# Altium PCB MCU099_MSPM0L1306_PCB.PcbDoc (part 3 of 5)
Units mil, origin at the board's own origin, x right, y up, seen from the top; angles counter-clockwise.
Board outline 2310.03 x 3906.03 mil, 4 copper layers (Top Layer, VCC Layer, GND Layer, Bottom Layer), stack 62.4 mil thick; 211 components, 124 nets, 674 pads, 192 vias.
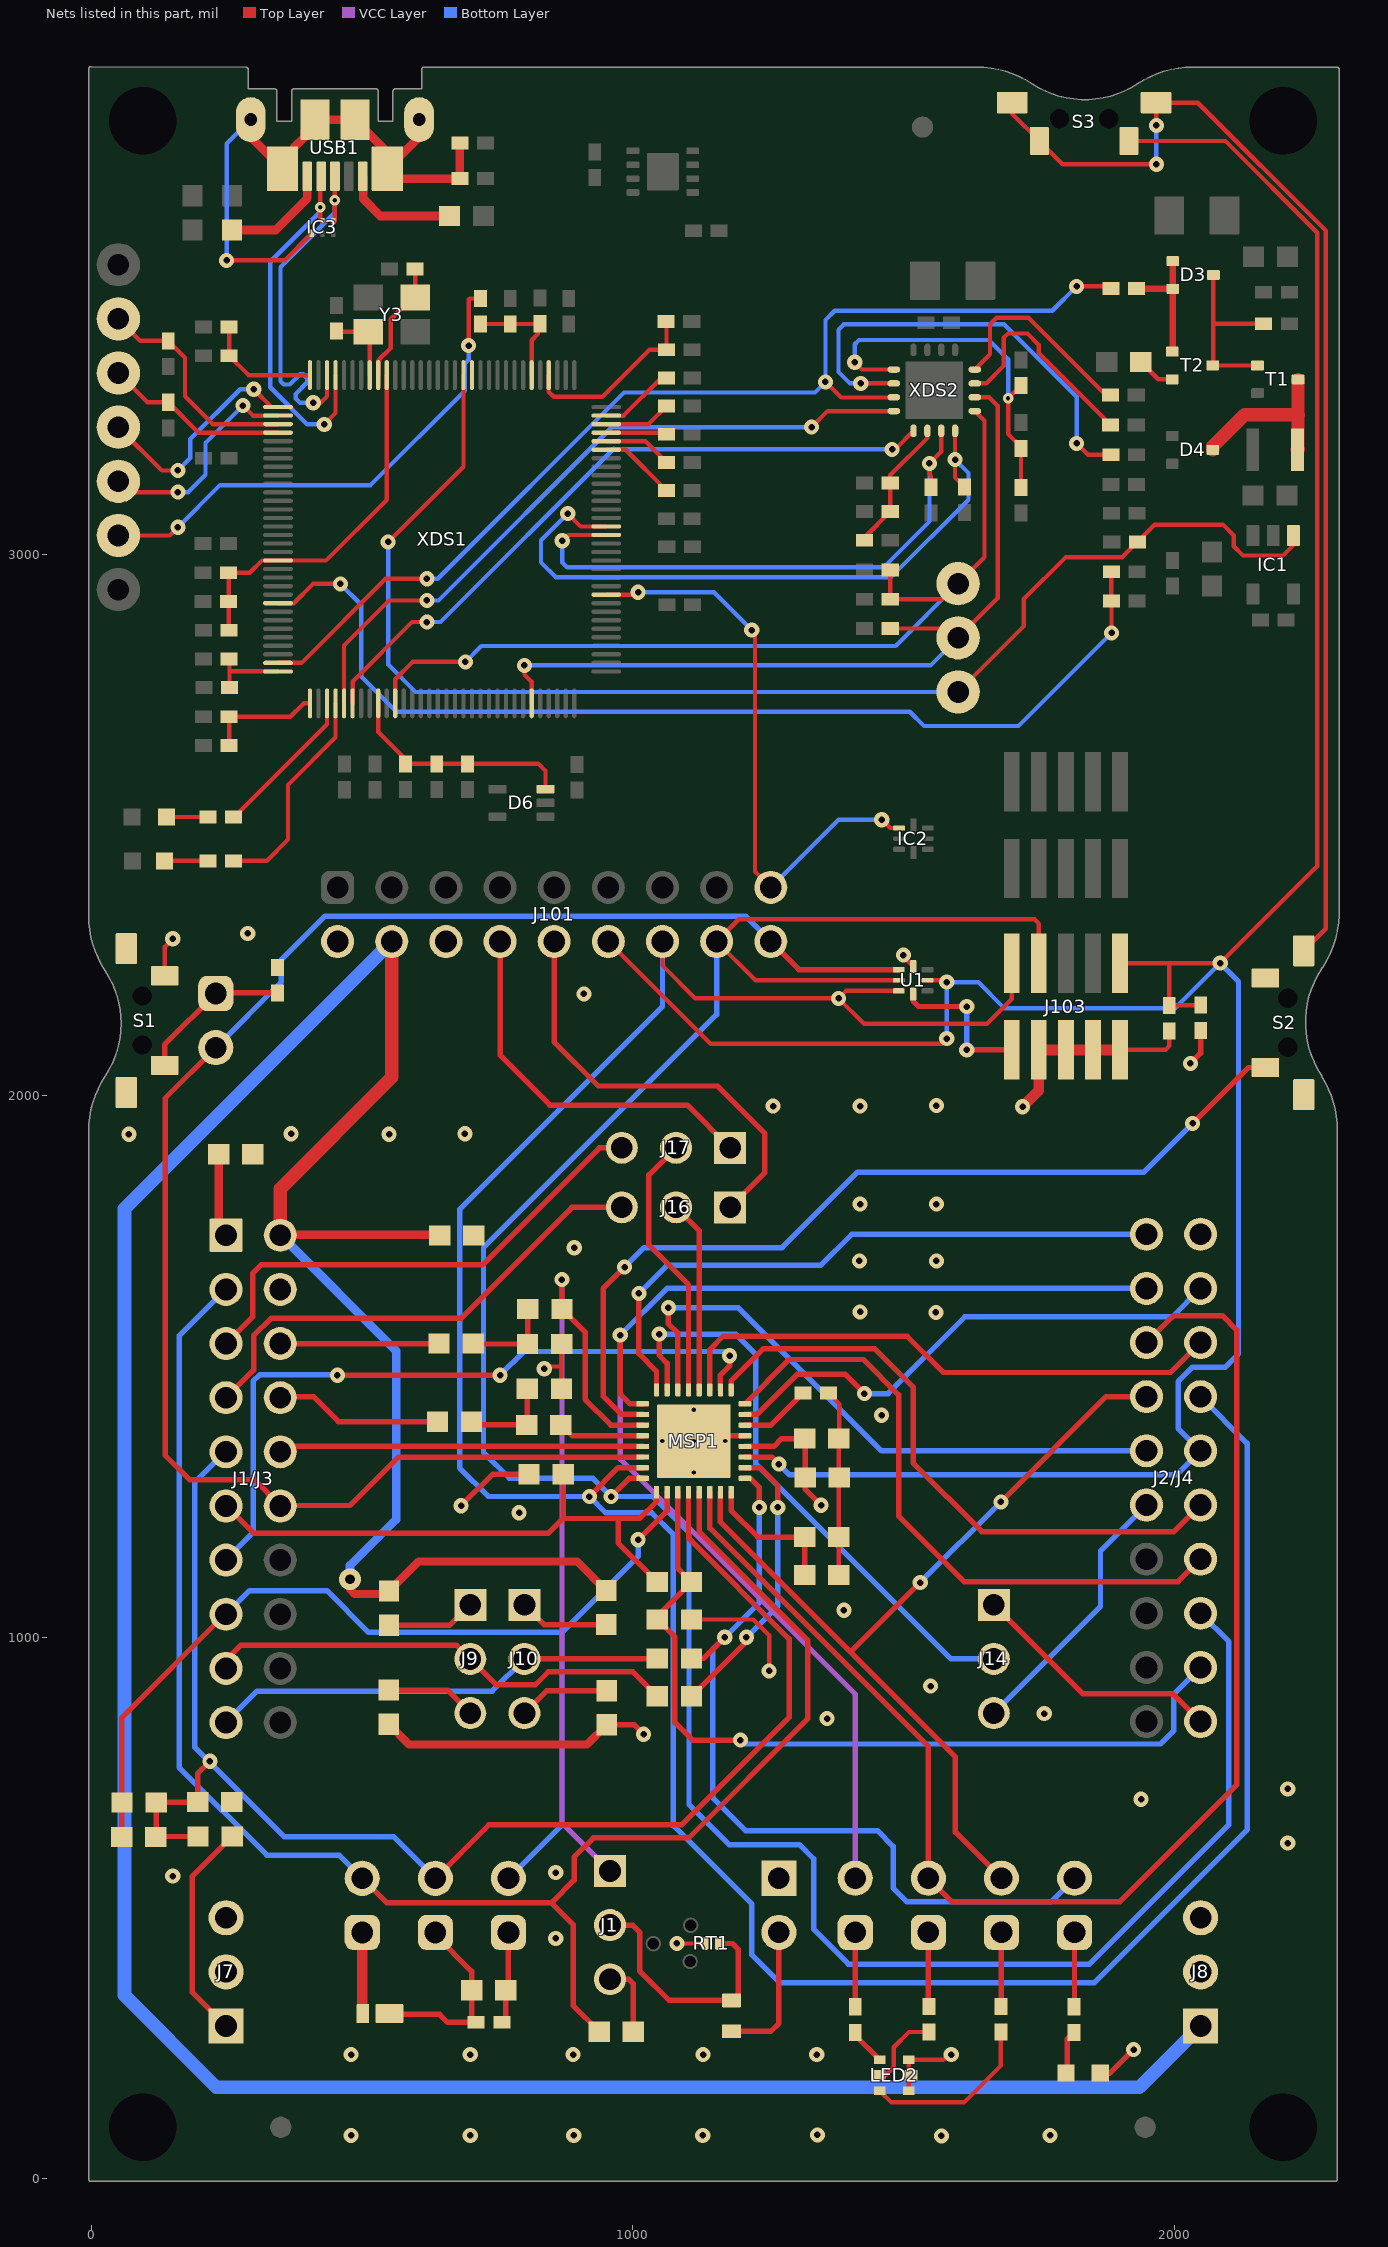
[diagram p4: the nets of this part, all layers, seen from the top]

## Part data (continued)
H1 H2: library part CMP-0077978-1, "Spacer Support, Nylon 66", Manufacturer="Kang Yang", ComponentLink1Description="Datasheet Link", ComponentLink1URL=https://sps16.itg.ti.com/sites/KMS/crossdivteams/altium/docs/ComponentDatasheets/1104004000018---MAE-10.pdf, CompType=Standoff, Key=MAE-10, MountType=N/A, PackageReference="Spacer Nylon Support", PartNumber=MAE-10, RoHS=Y
IC1: library part CMP-0074212-1, "2.7-4V Dual In/Single Out MOSFET, 0.5A Main/0.1A Aux Input, Act-Low Enable, Comm. Temp., DBV0005A (SOT-23-5)", Alternate Manufacturer="Texas Instruments", Alternate PartNumber=TPS2102DBVT, ComponentLink1Description="Datasheet Link", ComponentLink1URL=http://www.ti.com/lit/ds/symlink/tps2102.pdf, CompType=IC, Footprint Path 6=C:\AltiumLibraries\Footprints\TI\.PcbLib, LatestRevisionDate=2017-06-09, Manufacturer="Texas Instruments", MountType=SMT, PackageDescription=SOT-23-5, PackageReference=DBV0005A, PartNumber=TPS2102DBVR, Publisher="Texas Instruments", RoHS=Y, SizeArea_mm2=8.12, SizeAreaWB_mm2=14.82, SizeX_mm=2.8, SizeY_mm=2.9, SizeZ_mm=1.45, U/M=EA
IC2 U1: library part CMP-0043125-2, "Low-Capacitance + / - 15 kV ESD Protection Array for High-Speed Data Interfaces, 6 Channels, -40 to +85 degC, 8-pin UQFN (RSE), Green (RoHS & no Sb/Br)", Breakdown Voltage(Min)(V)=6, IO Capacitance(Typ)(pF)=1.6, IO Leakage Current(nA)=1, Manufacturer="Texas Instruments", 1394 / Firewire=TRUE, ComponentLink1Description="Manufacturer URL", ComponentLink1URL=http://www.ti.com/, ComponentLink2Description=Datasheet, ComponentLink2URL=http://www.ti.com/general/docs/lit/getliterature.tsp?genericPartNumber=TPD6E004&fileType=pdf, ComponentLink3Description="URL Link1", ComponentLink3URL=SamplesURL:http://www.ti.com/product/tpd6e004#samples, DatasheetVersion=SLLS799A, Eco-Plan="Green (RoHS & no Sb/Br)", IEC 61000-4-2 Air-Gap(+/- kV)=12, IEC 61000-4-2 Contact(+/- kV)=8, Mounting Technology="Surface Mount", PackageDescription="8-Pin Plastic Quad Flatpack No-Lead, 1.5 x 1.5 mm Body, 0.5 mm Pitch", PackageReference=RSE0008A, PackageVersion="revD, Jan-2011", PartNumber=TPD6E004RSER, Serial ATA / eSATA=TRUE, SubFamily="ESD Solution", USB High Speed=TRUE
IC3: library part CMP-0043115-1, "ESD-Protection Array for High-Speed Data Interfaces, 4 Channels, -40 to +85 degC, 6-pin SON (DRY), Green (RoHS & no Sb/Br)", Breakdown Voltage(Min)(V)=6, IO Capacitance(Typ)(pF)=1.6, IO Leakage Current(nA)=1, Manufacturer="Texas Instruments", 1394 / Firewire=TRUE, ComponentLink1Description="Manufacturer URL", ComponentLink1URL=http://www.ti.com/, ComponentLink2Description=Datasheet, ComponentLink2URL=http://www.ti.com/general/docs/lit/getliterature.tsp?genericPartNumber=TPD4E004&fileType=pdf, ComponentLink3Description="URL Link1", ComponentLink3URL=SamplesURL:http://www.ti.com/product/tpd4e004#samples, DatasheetVersion=SLVS729A, Eco-Plan="Green (RoHS & no Sb/Br)", IEC 61000-4-2 Air-Gap(+/- kV)=12, IEC 61000-4-2 Contact(+/- kV)=8, Mounting Technology="Surface Mount", PackageDescription="6-Pin Plastic Small Outline No-Lead, 1 x 1.45 x 0.6 mm Body, 0.5 mm Pitch", PackageReference=DRY0006A, PackageVersion="revF, Dec-2011", PartNumber=TPD4E004DRYR, Serial ATA / eSATA=TRUE, SubFamily="ESD Solution", USB High Speed=TRUE
IC4: library part CMP-0036329-3, "500mA, Adjustable, Low Quiescent Current, Low-Noise, High-PSRR, Single-Output LDO Regulator, DRB0008A (VSON-8)", Manufacturer="Texas Instruments", Operating Temperature Range="-40 to 125 C", Rating=Catalog, Accuracy(%)=2, AEC Category=Q200, AEC Qualified=N, ComponentLink1Description="Datasheet Link", ComponentLink1URL=http://www.ti.com/lit/ds/symlink/tps735.pdf, ComponentLink2Description="Product Folder", ComponentLink2URL=http://www.ti.com/product/tps735, ComponentLink3Description="Online Datasheet", ComponentLink3URL=http://www.ti.com/product/tps735/datasheet, CompType=IC, Fixed Output Options(V)=3.3, Iout(Max)(A)=0.5, Iq(Typ)(mA)=0.04, MountType=SMT, PackageDescription=VSON-8, PackageReference=DRB0008A, PartNumber=TPS73533DRBT, RoHS=Y, SizeArea_mm2=9.0, SizeAreaWB_mm2=16.0, SizeX_mm=3.0, SizeY_mm=3.0, SizeZ_mm=1.0, Vdo(Typ)(mV)=280, Vin(Max)(V)=6.5, Vin(Min)(V)=2.7, Vout Adj(Max)(V)=3.3, Vout Adj(Min)(V)=3.3
J1 J7 J8 J9 J10 J14 J16 J17: library part CMP-0002338-1, "Header, 100mil, 3x1, Tin, TH", Color=Black, Current_A=3A, Manufacturer="Sullins Connector Solutions", Supplier Part Number 1=S1012E-03-ND, Voltage_V=1.8kV, Cert_UL=Y, ClassName=Header, CNHeader=TRUE, ComponentLink1Description="Datasheet URL", ComponentLink1URL=http://www.sullinscorp.com/catalogs/77_PAGE108-109_.100_MALE_HDR.pdf, CompType=Header, ContactFinish=Tin, CT=FALSE, Gender=Male, Green_EU RoHS=Incomplete, Green_EU RoHS-2=Incomplete, Green_Lifecycle="Not Set", Green_REACh=Incomplete, LatestRevisionDate=26/05/2017, MountType=TH, Orientation=Vertical, PackageReference="Header, 3 PIN, 100mil, Tin", PartNumber=PEC03SAAN, PinCount=3, Pitch_mm=2.54, Publisher="Texas Instruments", RoHS=Y, Row_Count=1, Shrouded=N, Supplier 1=Digi-Key
J1/J3: library part BoosterPack_40pin_J1J3, "Receptacle, 2.54mm, 10x2, Tin, TH", Alternate Manufacturer="Major League Electronics", Alternate PartNumber=CRD-081413-A-G, Manufacturer=Samtec, Supplier Part Number 1=SAM1204-10-ND, ComponentLink1Description="Datasheet Link", CompType=Receptacle, LatestRevisionDate=2017-04-10, MountType=TH, Note="Booster Pack 40 pin J1 and J3", PackageReference="10x2 Receptacle", PartNumber=SSQ-110-03-T-D, Publisher="Texas Instruments", RoHS=Y, Supplier 1=Digi-Key, SymbolCreator=a0412235, SymbolVersion=2015-10-21
J2 J3 J4 J5 J6 J11 J12 J13: library part CMP-0075405-2, "Header, 100mil, 2x1, Gold, TH", Color=Black, Current_A=6.3A, Manufacturer=Samtec, Supplier Part Number 1=SAM1029-02-ND, Voltage_V=550V, Cert_CSA=Y, Cert_CULUS=N, Cert_UL=Y, Cert_VDE=N, ClassName=Header, ComponentLink1Description="Datasheet URL", ComponentLink1URL=http://samtec.com/ftppub/pdf/TSW_TH.PDF, CompType=Header, ContactFinish=Gold, Gender=Male, Green_EU RoHS=Passed, Green_EU RoHS-2=Passed, Green_Lifecycle=Active, Green_REACh=Passed, MountType=TH, Orientation=Vertical, PackageReference="2x1 Header", PartNumber=TSW-102-07-G-S, PinCount=2, Pitch_mm=2.54, RoHS=Y, Row_Count=1, Shrouded=N, Supplier 1=Digi-Key
J2/J4: library part BoosterPack_40pin_J2J4, "Receptacle, 2.54mm, 10x2, Tin, TH", Alternate Manufacturer="Major League Electronics", Alternate PartNumber=CRD-081413-A-G, Manufacturer=Samtec, Supplier Part Number 1=SAM1204-10-ND, ComponentLink1Description="Datasheet Link", CompType=Receptacle, LatestRevisionDate=2017-04-10, MountType=TH, Note="Booster Pack 40 pin J2 and J4", PackageReference="10x2 Receptacle", PartNumber=SSQ-110-03-T-D, Publisher="Texas Instruments", RoHS=Y, Supplier 1=Digi-Key, SymbolCreator=a0412235, SymbolVersion=2015-10-21
J15: library part CMP-0055312-1, "Header, 100mil, 2x1, Tin, TH", Manufacturer=Molex, Supplier Part Number 1=WM8072-ND, ClassName=Header, CNHeader=TRUE, ComponentLink1Description="Datasheet URL", ComponentLink1URL=http://www.molex.com/pdm_docs/sd/901200122_sd.pdf, CompType=Header, CT=FALSE, Green_EU RoHS=Passed, Green_EU RoHS-2=Passed, Green_Lifecycle=Active, Green_REACh=Passed, LatestRevisionDate=26/05/2017, MountType=TH, PackageReference="Header 2x1", PartNumber=90120-0122, Publisher="Texas Instruments", RoHS=Y, Supplier 1=Digi-Key, Supplier 2=Newark, Supplier 3=Mouser, Supplier Part Number 2=19M8215, Supplier Part Number 3=538-90120-0122
J101: library part CMP-0054622-1, "Header, 2.54mm, 9x2, Tin, TH", Color=Black, Current_A=3A, Manufacturer="Sullins Connector Solutions", Supplier Part Number 1=S2012E-09-ND, Cert_UL=Y, ClassName=Header, CNHeader=TRUE, ComponentLink1Description="Datasheet URL", ComponentLink1URL=http://www.sullinscorp.com/catalogs/77_PAGE108-109_.100_MALE_HDR.pdf, CompType=Header, ContactFinish=Tin, CT=FALSE, Gender=Male, LatestRevisionDate=26/05/2017, MountType=TH, Orientation=Vertical, PackageReference="Header, 2.54mm, 9x2, TH", PartNumber=PEC09DAAN, PinCount=18, Pitch_mm=2.54, Publisher="Texas Instruments", RoHS=Y, Row_Count=2, RowSpacing_mm=2.54, Shrouded=N, Supplier 1=Digi-Key
J102 J103: library part CMP-0075634-1, "Header(Shrouded), 1.27mm, 5x2, Gold, SMT", Color=Black, Current_A=3.3A, Manufacturer=Samtec, Supplier Part Number 1=SAM8799-ND, Cert_CSA=Y, Cert_UL=Y, CNHeader=False, ComponentLink1Description="Datasheet URL", ComponentLink1URL=http://suddendocs.samtec.com/prints/ftsh-1xx-xx-xxx-dv-xxx-mkt.pdf, CompType=Header, ContactFinish=Gold, CT=False, Gender=Male, LatestRevisionDate=2017-07-12, MountType=SMT, Orientation=Vertical, PackageReference="Header(Shrouded), 1.27mm, 5x2, SMT", PartNumber=FTSH-105-01-L-DV-K, PinCount=10, Pitch_mm=1.27, Publisher="Texas Instruments", RoHS=Y, Row_Count=2, RowSpacing_mm=1.27, Shrouded=Y, Supplier 1=Digi-Key, Supplier 2=Farnell, Supplier Part Number 2=1872577
L1: library part CMP-0059590-1, "Inductor, Wirewound, Ceramic, 2.2 uH, 0.89 A, 0.13 ohm, SMD", Manufacturer="Taiyo Yuden", Supplier Part Number 1=587-1618-1-ND, Value1="0.13 ohm", Value2=0.89A, ValueDisplayed=2.2uH, AEC Category=Q200, AEC Grade=N/A, AEC Qualified=N, ComponentLink1Description="Datasheet link", ComponentLink1URL=http://www.yuden.co.jp/productdata/catalog/en/wound02_e.pdf, CompType=Inductor, DCR_ohm=0.13, Green_EU RoHS=Passed, Green_EU RoHS-2=Passed, Green_Lifecycle=Active, Green_REACh=Passed, Imax_A=890mA, Ind_H=2.2µH, Irms="1.1A @ 40C rise", Isat="0.89A @ 30% inductance drop", LatestRevisionDate=2017-06-02, Material=Ceramic, MountType=SMT, PackageReference=2.5x1.8x1.8mm, PartNumber=CBC2518T2R2M, Published=2008-06-26, Publisher="Texas Instruments", RoHS=Y, SizeArea_mm2=4.5, SizeAreaWB_mm2=9.8, SizeX_mm=2.5, SizeY_mm=1.8, SizeZ_mm=1.8, Supplier 1=Digi-Key, Supplier 2=Newark, Supplier 3=Mouser, Supplier Part Number 2=18J0834, Supplier Part Number 3=963-CBC2518T2R2M, Technology=Wirewound
LED1 LED101: library part CMP-0002972-3, "LED, Red, SMD", Color=Red, Manufacturer="Stanley Electric Co., LTD", Power_TotalModule=57.5mW, Value1=0.0575W, Value2=1.7V, ComponentLink1Description="Datasheet link", ComponentLink1URL=https://sps06.itg.ti.com/sites/KMS/crossdivteams/altium/docs/ComponentDatasheets/BR1111C-TR.pdf, CompType=LED, Io_A=20mA, Ir_A=100µA, MountType=SMT, PackageReference=1.6x0.8mm, PartNumber=BR1111C-TR, RoHS=Y, TJmax_C=85°C, Type=?, Vf_V=1.7V, Vr_V=4V
LED2: library part CMP-0074720-2, "LED, RGB, TH", Color=RGB, Manufacturer=Everlight, Value2=3.8V, Angle=120.0, ComponentLink1Description="Datasheet link", ComponentLink1URL=http://www.everlight.com/file/ProductFile/19-337-R6GHBHC-A01-2T.pdf, CompType=LED, Io_A=25mA, Ir_A=50µA, MountType=SMT, PackageReference=1.6x1.6mm, PartNumber=19-337/R6GHBHC-A01/2T, RoHS=Y, TJmax_C=85°C, Type=?, Vf_V=3.8V, Vr_V=5V
LED102: library part CMP-0002827-3, "LED, Green, SMD", Color=green, Manufacturer=Lite-On, Power_TotalModule=100mW, Value1=0.1W, Value2=2.1V, ComponentLink1Description="Datasheet link", ComponentLink1URL=https://sps06.itg.ti.com/sites/KMS/crossdivteams/altium/docs/ComponentDatasheets/LTST-C190GKT.pdf, CompType=LED, Io_A=20mA, MountType=SMT, PackageReference=1.6x0.8x0.8mm, PartNumber=LTST-C190GKT, RoHS=Y, Type=?, Vf_V=2.1V
LOGO1: library part CMP-0074844-1, LatestRevisionDate=2017-07-06, Lib Reference="CE Mark", PartNumber="CE Mark", Published=2009-03-03, Publisher="Texas Instruments", SymbolCreator=a0412235
Logo2 Logo3: library part CMP-0074838-1, "Texas Instrument Corporate Signature", ClassName=Logo, LatestRevisionDate=2017-07-06, Lib Reference=TI_Logo, PartNumber="Texas Instruments", Published=2009-03-03, Publisher="Texas Instruments", SymbolCreator=a0412235, SymbolVersion=2011-08-22
Logo4: library part CMP-0074840-1, "ESD Susceptible Symbol", LatestRevisionDate=2017-07-06, Lib Reference=ESD_Susceptible, PartNumber="ESD Susceptible", Published=2009-03-03, Publisher="Texas Instruments", SymbolCreator=a0412235, SymbolVersion=2011-08-22
Logo6: library part CMP-0074847-1, "FCC_disclaimer", LatestRevisionDate=2017-07-06, Lib Reference=FCC_disclaimer, PartNumber="FCC disclaimer", Published=2009-03-03, Publisher="Texas Instruments"
Logo7: library part CMP-0074769-1, Lib Reference="WEEE logo", PartNumber="WEEE logo"
MH1 MH2 MH3 MH4: library part CMP-0078424-2, "PCB Mounting Hole, No Pad", Manufacturer=Any, PartNumber=N/A, CompType="Mounting Hole", Key="Mounting Hole (non-standard) No Pad", MountType=N/A, PackageReference="Mounting Hole"
MSP1: library part CMP-0093968-1, "MSPM0L130x Mixed-Signal Microcontrollers", Frequency_Fixed=32MHz, Manufacturer="Texas Instruments", Max Supply Voltage=3.6V, Min Supply Voltage=1.62V, Operating Temperature Range="-40°C to +125°C", AEC Qualified=No, Core Architecture="ARM Cortex-M0+", Data Bus Width=32bits, Datasheet Path=datasheets/IC-MSPM0L1306SRHB.pdf, helpURL=https://upverter.com/upn/revision/6d805f7362bc03c2/, Interface=I2C,SPI,UART,LIN,IrDA,SMBus, Memory Size=64KBytes, Memory Type=FLASH, Number Of A/D Converters=1, Number Of Adc Channels=10, Number Of Cores=1, Number Of I2C Channels=2, Number Of I/Os=28, Number Of Pwm Channels=8, Number Of Spi Channels=1, Number Of Timers/Counters=4, Number Of Uart Channels=2, PackageReference=VQFN32, Part Number=MSPM0L1306SRHB, PartNumber=MSPM0L1306SRHB, Ram Size=4KBytes, RoHS=UNKNOWN, SizeZ_mm=1mm, Standoff Height=0mm, TaMax_C=+125°C, TaMin_C=-40°C, TJmax_C=+130°C
R1 R11 R46 R47 R50: library part CMP-0026737-1, "RES, 47.0 k, 1%, 0.0625 W, 0402", Manufacturer="Yageo America", Power_W=62.5mW, Supplier Part Number 1=311-47.0KLRCT-ND, TempCo="100 ppm/C", Tolerance_%=1%, Value2=0.0625W, Value_Code=47k0, ValueDisplayed=47.0k, AEC Category=Q200, AEC Grade=N/A, AEC Qualified=N, ComponentLink1Description="Datasheet link", ComponentLink1URL=http://www.yageo.com/documents/recent/PYu-RC0402_51_RoHS_L_6_r.pdf, CompType=Resistor, LatestRevisionDate=2017-03-09, MountType=SMT, PackageReference=0402, PartNumber=RC0402FR-0747KL, Published=2008-06-26, Publisher="Texas Instruments", Res_ohm=47k, RoHS=Y, SizeArea_mm2=0.5, SizeX_mm=1, SizeY_mm=0.5, SizeZ_mm=0.6, Supplier 1=Digi-Key, Supplier 2=Newark, Supplier 3=Mouser, Supplier Part Number 2=67R9937, Supplier Part Number 3=603-RC0402FR-0747KL, Technology="Thick Film", U/M=EA, Value1=1%, VDC_V=50V
R2: library part CMP-0080084-1, "RES, 10.0 k, 0.1%, 0.1 W, AEC-Q200 Grade 0, 1.6x0.8mm", Manufacturer=Panasonic, Power_W=100mW, Supplier Part Number 1=P10KBDCT-ND, TempCo="10 ppm/C", Tolerance_%=0.1%, Value2=0.1W, Value_Code=10k0, ValueDisplayed=10.0k, AEC Category=Q200, AEC Grade=0, AEC Qualified=Y, ComponentLink1Description="Datasheet link", ComponentLink1URL=https://industrial.panasonic.com/cdbs/www-data/pdf/RDM0000/AOA0000C307.pdf, CompType=Resistor, MountType=SMT, PackageReference=1.6x0.8mm, PartNumber=ERA3ARB103V, Res_ohm=10k, RoHS=Y, SizeArea_mm2=1.28, SizeAreaWB_mm2=4.68, SizeX_mm=1.6, SizeY_mm=0.8, SizeZ_mm=0.55, Supplier 1=Digi-Key, Supplier 2=Newark, Supplier 3=Mouser, Supplier Part Number 2=62W8891, Supplier Part Number 3=667-ERA-3ARB103V, Technology="Thin Film", Value1=0.1%, VDC_V=150V
R3: library part CMP-0026736-1, "RES, 470, 1%, 0.063 W, 0402", Manufacturer="Yageo America", Power_W=63mW, Supplier Part Number 1=311-470LRCT-ND, TempCo="100 ppm/C", Tolerance_%=1%, Value2=0.063W, Value_Code=470R, ValueDisplayed=470, AEC Category=Q200, AEC Grade=N/A, AEC Qualified=N, ComponentLink1Description="Datasheet link", ComponentLink1URL=http://www.yageo.com/documents/recent/PYu-RC_Group_51_RoHS_L_04.pdf, CompType=Resistor, LatestRevisionDate=2017-03-09, MountType=SMT, PackageReference=0402, PartNumber=RC0402FR-07470RL, Published=2008-06-26, Publisher="Texas Instruments", Res_ohm=470, RoHS=Y, SizeArea_mm2=0.5, SizeX_mm=1, SizeY_mm=0.5, SizeZ_mm=0.6, Supplier 1=Digi-Key, Supplier 2=Newark, Supplier 3=Mouser, Supplier Part Number 2=67R9940, Supplier Part Number 3=603-RC0402FR-07470RL, Technology="Thick Film", U/M=EA, Value1=1%, VDC_V=50V
R4: library part CMP-0025884-2, "RES, 0, 5%, 0.125 W, 0603", Manufacturer=Vishay/Beyschlag, Power_W=125mW, Supplier Part Number 1=MCT0603-0.0-ZZCT-ND, TempCo=ppm/C, Tolerance_%=5%, Value2=0.125W, Value_Code=0000, ValueDisplayed=DNC, AEC Category=Q200, AEC Grade=N/A, AEC Qualified=N, ComponentLink1Description="Datasheet link", ComponentLink1URL=http://www.vishay.com/docs/28705/mcx0x0xpro.pdf, CompType=Resistor, EIA_Code=E24, LatestRevisionDate=2017-03-09, MountType=SMT, PackageReference=0603, PartNumber=MCT06030Z0000ZP500, Published=2008-06-26, Publisher="Texas Instruments", Res_ohm=0, RoHS=Y, SizeArea_mm2=1.28, SizeX_mm=1.6, SizeY_mm=0.8, SizeZ_mm=1, Supplier 1=Digi-Key, Supplier 2=Newark, Supplier 3=Mouser, Supplier Part Number 2=96Y9454, Supplier Part Number 3=594-MCT06030Z0000ZP5, Technology="Thin Film", U/M=EA, Value1=5%
R5: library part CMP-0022292-4, "RES, 2.37 M, 1%, 0.1 W, AEC-Q200 Grade 0, 0603", Manufacturer=Vishay-Dale, Power_W=100mW, Supplier Part Number 1=541-2.37MHCT-ND, TempCo="100 ppm/C", Tolerance_%=1%, Value2=0.1W, Value_Code=2M37, ValueDisplayed=2.37M, AEC Category=Q200, AEC Grade=0, AEC Qualified=Y, ComponentLink1Description="Datasheet link", ComponentLink1URL=http://www.vishay.com/docs/20035/dcrcwe3.pdf, CompType=Resistor, EIA_Code=E96, MountType=SMT, PackageReference=0603, PartNumber=CRCW06032M37FKEA, Res_ohm=2.37M, RoHS=E, SizeArea_mm2=1.28, SizeX_mm=1.6, SizeY_mm=0.8, SizeZ_mm=1, Supplier 1=Digi-Key, Supplier 2=Mouser, Supplier Part Number 2=71-CRCW06032M37FKEA, Technology="Thick Film", Value1=1%, VDC_V=75V
R6: library part CMP-0026815-1, "RES, 100 k, 0.1%, 0.063 W, 0402", Manufacturer="Susumu Co Ltd", Power_W=63mW, Supplier Part Number 1=RG10P100KBCT-ND, TempCo="25 ppm/C", Tolerance_%=0.1%, Value2=0.063W, Value_Code=100k, AEC Category=Q200, AEC Qualified=?, ComponentLink1Description="Datasheet link", ComponentLink1URL=http://www.susumu-usa.com/pdf/RG_Data_Sheet.pdf, CompType=Resistor, EIA_Code=E192, LatestRevisionDate=2017-03-09, MountType=SMT, PackageReference=0402, PartNumber=RG1005P-104-B-T5, Published=2008-06-26, Publisher="Texas Instruments", Res_ohm=100k, RoHS=Y, SizeArea_mm2=0.5, SizeX_mm=1, SizeY_mm=0.5, SizeZ_mm=0.6, Supplier 1=Digi-Key, Supplier 2=Newark, Supplier 3=Mouser, Supplier Part Number 2=85K1460, Supplier Part Number 3=754-RG1005P-104-B-T5, Technology="Thin Film", U/M=EA, Value1=0.1%, ValueDisplayed=100k
R7 R8: library part CMP-0025927-5, "RES, 4.7 k, 5%, 0.1 W, 0603", Manufacturer=Yageo, Power_W=100mW, Supplier Part Number 1=311-4.7KGRCT-ND, TempCo="100 ppm/C", Tolerance_%=5%, Value2=0.1W, Value_Code=4k70, ValueDisplayed=4.7k, AEC Category=Q200, AEC Grade=N/A, AEC Qualified=N, ComponentLink1Description="Datasheet link", ComponentLink1URL=http://www.yageo.com/pdf/Pu-RC0603_51_PbFree_L_2.pdf, CompType=Resistor, EIA_Code=E24, MountType=SMT, PackageReference=0603, PartNumber=RC0603JR-074K7L, Res_ohm=4.7k, RoHS=Y, SizeArea_mm2=1.28, SizeAreaWB_mm2=4.68, SizeX_mm=1.6, SizeY_mm=0.8, SizeZ_mm=1, Supplier 1=Digi-Key, Supplier 2=Mouser, Supplier 3=Farnell, Supplier Part Number 2=603-RC0603JR-074K7L, Supplier Part Number 3=9233466, Technology="Thick Film", Value1=5%, VDC_V=75V
R9 R10: library part CMP-0025906-5, "RES, 2.2 k, 5%, 0.1 W, 0603", Manufacturer=Yageo, PartNumber=RC0603JR-072K2L, Power_W=100mW, Supplier Part Number 1=311-2.2KGRCT-ND, TempCo="100 ppm/C", Tolerance_%=5%, Value2=0.1W, Value_Code=2k20, ValueDisplayed=2.2k, AEC Category=Q200, AEC Grade=N/A, AEC Qualified=N, ComponentLink1Description="Datasheet link", ComponentLink1URL=http://www.yageo.com/pdf/Pu-RC0603_51_PbFree_L_2.pdf, CompType=Resistor, EIA_Code=E24, MountType=SMT, PackageReference=0603, Res_ohm=2.2k, RoHS=Y, SizeArea_mm2=1.28, SizeAreaWB_mm2=4.68, SizeX_mm=1.6, SizeY_mm=0.8, SizeZ_mm=1, Supplier 1=Digi-Key, Supplier 2=Mouser, Supplier 3=Farnell, Supplier Part Number 2=603-RC0603JR-072K2L, Supplier Part Number 3=9233423, Technology="Thick Film", Value1=5%, VDC_V=75V
R12 R20: library part CMP-0025904-5, "RES, 270, 5%, 0.1 W, 0603", Manufacturer=Yageo, Power_W=100mW, Supplier Part Number 1=311-270GRCT-ND, TempCo="100 ppm/C", Tolerance_%=5%, Value2=0.1W, Value_Code=270R, ValueDisplayed=270, AEC Category=Q200, AEC Grade=N/A, AEC Qualified=N, ComponentLink1Description="Datasheet link", ComponentLink1URL=http://www.yageo.com/pdf/Pu-RC0603_51_PbFree_L_2.pdf, CompType=Resistor, EIA_Code=E24, MountType=SMT, PackageReference=0603, PartNumber=RC0603JR-07270RL, Res_ohm=270, RoHS=Y, SizeArea_mm2=1.28, SizeAreaWB_mm2=4.68, SizeX_mm=1.6, SizeY_mm=0.8, SizeZ_mm=1, Supplier 1=Digi-Key, Supplier 2=Mouser, Supplier 3=Farnell, Supplier Part Number 2=603-RC0603JR-07270RL, Supplier Part Number 3=9233300, Technology="Thick Film", Value1=5%, VDC_V=75V
R13 R14: library part CMP-0026906-1, "RES, 330, 5%, 0.063 W, 0402", Manufacturer=Vishay-Dale, Power_W=63mW, Supplier Part Number 1=541-330JCT-ND, TempCo="200 ppm/C", Tolerance_%=5%, Value2=0.063W, Value_Code=330R, ValueDisplayed=330, AEC Category=Q200, AEC Qualified=?, ComponentLink1Description="Datasheet link", ComponentLink1URL=http://www.vishay.com/docs/20035/dcrcwe3.pdf, CompType=Resistor, EIA_Code=E24, LatestRevisionDate=2017-03-09, MountType=SMT, PackageReference=0402, PartNumber=CRCW0402330RJNED, Published=2008-06-26, Publisher="Texas Instruments", Res_ohm=330, RoHS=Y, SizeArea_mm2=0.5, SizeX_mm=1, SizeY_mm=0.5, SizeZ_mm=0.6, Supplier 1=Digi-Key, Supplier 2=Newark, Supplier 3=Mouser, Supplier Part Number 2=59M6728, Supplier Part Number 3=71-CRCW0402J-330-E3, Technology="Thick Film", U/M=EA, Value1=5%, VDC_V=50V
R15: library part CMP-0026878-1, "RES, 220, 5%, 0.063 W, 0402", Manufacturer=Vishay-Dale, Power_W=63mW, Supplier Part Number 1=541-220JCT-ND, TempCo="200 ppm/C", Tolerance_%=5%, Value2=0.063W, Value_Code=220R, ValueDisplayed=220, AEC Category=Q200, AEC Qualified=?, ComponentLink1Description="Datasheet link", ComponentLink1URL=http://www.vishay.com/docs/20035/dcrcwe3.pdf, CompType=Resistor, EIA_Code=E24, LatestRevisionDate=2017-03-09, MountType=SMT, PackageReference=0402, PartNumber=CRCW0402220RJNED, Published=2008-06-26, Publisher="Texas Instruments", Res_ohm=220, RoHS=Y, SizeArea_mm2=0.5, SizeX_mm=1, SizeY_mm=0.5, SizeZ_mm=0.6, Supplier 1=Digi-Key, Supplier 2=Newark, Supplier 3=Mouser, Supplier Part Number 2=59M6718, Supplier Part Number 3=71-CRCW0402J-220-E3, Technology="Thick Film", U/M=EA, Value1=5%, VDC_V=50V
R16 R17 R18 R19: library part CMP-0025884-2, "RES, 0, 5%, 0.125 W, 0603", Manufacturer=Vishay/Beyschlag, Power_W=125mW, Supplier Part Number 1=MCT0603-0.0-ZZCT-ND, TempCo=ppm/C, Tolerance_%=5%, Value2=0.125W, Value_Code=0000, ValueDisplayed=0, AEC Category=Q200, AEC Grade=N/A, AEC Qualified=N, ComponentLink1Description="Datasheet link", ComponentLink1URL=http://www.vishay.com/docs/28705/mcx0x0xpro.pdf, CompType=Resistor, EIA_Code=E24, LatestRevisionDate=2017-03-09, MountType=SMT, PackageReference=0603, PartNumber=MCT06030Z0000ZP500, Published=2008-06-26, Publisher="Texas Instruments", Res_ohm=0, RoHS=Y, SizeArea_mm2=1.28, SizeX_mm=1.6, SizeY_mm=0.8, SizeZ_mm=1, Supplier 1=Digi-Key, Supplier 2=Newark, Supplier 3=Mouser, Supplier Part Number 2=96Y9454, Supplier Part Number 3=594-MCT06030Z0000ZP5, Technology="Thin Film", U/M=EA, Value1=5%
R24 R25 R26 R35: library part CMP-0026852-1, "RES, 1.0 k, 5%, 0.063 W, 0402", Manufacturer=Vishay-Dale, Power_W=63mW, Supplier Part Number 1=541-1.0KJCT-ND, TempCo="200 ppm/C", Tolerance_%=5%, Value2=0.063W, Value_Code=1k00, ValueDisplayed=1.0k, AEC Category=Q200, AEC Qualified=?, ComponentLink1Description="Datasheet link", ComponentLink1URL=http://www.vishay.com/docs/20035/dcrcwe3.pdf, CompType=Resistor, EIA_Code=E24, LatestRevisionDate=2017-03-09, MountType=SMT, PackageReference=0402, PartNumber=CRCW04021K00JNED, Published=2008-06-26, Publisher="Texas Instruments", Res_ohm=1k, RoHS=Y, SizeArea_mm2=0.5, SizeX_mm=1, SizeY_mm=0.5, SizeZ_mm=0.6, Supplier 1=Digi-Key, Supplier 2=Newark, Supplier 3=Mouser, Supplier Part Number 2=59M6691, Supplier Part Number 3=71-CRCW0402J-1.0K-E3, Technology="Thick Film", U/M=EA, Value1=5%, VDC_V=50V
R27: library part CMP-0026852-1, "RES, 1.0 k, 5%, 0.063 W, 0402", Manufacturer=Vishay-Dale, Power_W=63mW, Supplier Part Number 1=541-1.0KJCT-ND, TempCo="200 ppm/C", Tolerance_%=5%, Value2=0.063W, Value_Code=1k00, ValueDisplayed=DNC, AEC Category=Q200, AEC Qualified=?, ComponentLink1Description="Datasheet link", ComponentLink1URL=http://www.vishay.com/docs/20035/dcrcwe3.pdf, CompType=Resistor, EIA_Code=E24, LatestRevisionDate=2017-03-09, MountType=SMT, PackageReference=0402, PartNumber=CRCW04021K00JNED, Published=2008-06-26, Publisher="Texas Instruments", Res_ohm=1k, RoHS=Y, SizeArea_mm2=0.5, SizeX_mm=1, SizeY_mm=0.5, SizeZ_mm=0.6, Supplier 1=Digi-Key, Supplier 2=Newark, Supplier 3=Mouser, Supplier Part Number 2=59M6691, Supplier Part Number 3=71-CRCW0402J-1.0K-E3, Technology="Thick Film", U/M=EA, Value1=5%, VDC_V=50V
R28: library part CMP-0026824-3, "RES, 100, 5%, 0.063 W, AEC-Q200 Grade 0, 0402", Manufacturer=Vishay-Dale, Power_W=63mW, Supplier Part Number 1=541-100JCT-ND, TempCo="200 ppm/C", Tolerance_%=5%, Value2=0.063W, Value_Code=100R, ValueDisplayed=100, AEC Category=Q200, AEC Grade=0, AEC Qualified=Y, ComponentLink1Description="Datasheet link", ComponentLink1URL=http://www.vishay.com/docs/20035/dcrcwe3.pdf, CompType=Resistor, EIA_Code=E24, MountType=SMT, PackageReference=0402, PartNumber=CRCW0402100RJNED, Res_ohm=100, RoHS=E, SizeArea_mm2=0.5, SizeX_mm=1, SizeY_mm=0.5, SizeZ_mm=0.6, Supplier 1=Digi-Key, Supplier 2=Newark, Supplier 3=Mouser, Supplier Part Number 2=59M6700, Supplier Part Number 3=71-CRCW0402J-100-E3, Technology="Thick Film", Value1=5%, VDC_V=50V
R29 R30: library part CMP-0026934-2, "RES, 470, 5%, 0.063 W, 0402", Manufacturer=Vishay-Dale, Power_W=63mW, Supplier Part Number 1=541-470JCT-ND, TempCo="200 ppm/C", Tolerance_%=5%, Value2=0.063W, Value_Code=470R, ValueDisplayed=470, AEC Category=Q200, AEC Qualified=?, ComponentLink1Description="Datasheet link", ComponentLink1URL=http://www.vishay.com/docs/20035/dcrcwe3.pdf, CompType=Resistor, EIA_Code=E24, LatestRevisionDate=2017-03-09, MountType=SMT, PackageReference=0402, PartNumber=CRCW0402470RJNED, Published=2008-06-26, Publisher="Texas Instruments", Res_ohm=470, RoHS=Y, SizeArea_mm2=0.5, SizeX_mm=1, SizeY_mm=0.5, SizeZ_mm=0.6, Supplier 1=Digi-Key, Supplier 2=Newark, Supplier 3=Mouser, Supplier Part Number 2=59M6737, Supplier Part Number 3=71-CRCW0402J-470-E3, Technology="Thick Film", U/M=EA, Value1=5%, VDC_V=50V
R31 R90 R91: library part CMP-0026825-4, "RES, 10 k, 5%, 0.063 W, 0402", Manufacturer=Vishay-Dale, Power_W=63mW, Supplier Part Number 1=541-10KJCT-ND, TempCo="200 ppm/C", Tolerance_%=5%, Value2=0.063W, Value_Code=10k0, ValueDisplayed=10k, AEC Category=Q200, AEC Qualified=?, ComponentLink1Description="Datasheet link", ComponentLink1URL=http://www.vishay.com/docs/20035/dcrcwe3.pdf, CompType=Resistor, EIA_Code=E24, LatestRevisionDate=2017-03-09, MountType=SMT, PackageReference=0402, PartNumber=CRCW040210K0JNED, Published=2008-06-26, Publisher="Texas Instruments", Res_ohm=10k, RoHS=Y, SizeArea_mm2=0.5, SizeX_mm=1, SizeY_mm=0.5, SizeZ_mm=0.6, Supplier 1=Digi-Key, Supplier 2=Newark, Supplier 3=Mouser, Supplier Part Number 2=59M6696, Supplier Part Number 3=71-CRCW0402J-10K-E3, Technology="Thick Film", U/M=EA, Value1=5%, VDC_V=50V
R33: library part CMP-0026413-2, "RES, 4.87 k, 1%, 0.063 W, AEC-Q200 Grade 0, 0402", Manufacturer=Vishay-Dale, Power_W=63mW, Supplier Part Number 1=541-4.87KLCT-ND, TempCo="100 ppm/C", Tolerance_%=1%, Value2=0.063W, Value_Code=4k87, ValueDisplayed=4.87k, AEC Category=Q200, AEC Grade=0, AEC Qualified=Y, ComponentLink1Description="Datasheet link", ComponentLink1URL=http://www.vishay.com/docs/20035/dcrcwe3.pdf, CompType=Resistor, EIA_Code=E96, MountType=SMT, PackageReference=0402, PartNumber=CRCW04024K87FKED, Res_ohm=4.87k, RoHS=E, SizeArea_mm2=0.5, SizeX_mm=1, SizeY_mm=0.5, SizeZ_mm=0.6, Supplier 1=Digi-Key, Supplier 2=Newark, Supplier 3=Mouser, Supplier Part Number 2=52K7047, Supplier Part Number 3=71-CRCW0402-4.87K-E3, Technology="Thick Film", Value1=1%, VDC_V=50V
R34: library part CMP-0026824-1, "RES, 100, 5%, 0.063 W, 0402", Manufacturer=Vishay-Dale, Power_W=63mW, Supplier Part Number 1=541-100JCT-ND, TempCo="200 ppm/C", Tolerance_%=5%, Value2=0.063W, Value_Code=100R, ValueDisplayed=100, AEC Category=Q200, AEC Qualified=?, ComponentLink1Description="Datasheet link", ComponentLink1URL=http://www.vishay.com/docs/20035/dcrcwe3.pdf, CompType=Resistor, EIA_Code=E24, LatestRevisionDate=2017-03-09, MountType=SMT, PackageReference=0402, PartNumber=CRCW0402100RJNED, Published=2008-06-26, Publisher="Texas Instruments", Res_ohm=100, RoHS=Y, SizeArea_mm2=0.5, SizeX_mm=1, SizeY_mm=0.5, SizeZ_mm=0.6, Supplier 1=Digi-Key, Supplier 2=Newark, Supplier 3=Mouser, Supplier Part Number 2=59M6700, Supplier Part Number 3=71-CRCW0402J-100-E3, Technology="Thick Film", U/M=EA, Value1=5%, VDC_V=50V
R36: library part CMP-0026946-3, "RES, 51, 5%, 0.063 W, AEC-Q200 Grade 0, 0402", Manufacturer=Vishay-Dale, Power_W=63mW, Supplier Part Number 1=541-51JCT-ND, TempCo="200 ppm/C", Tolerance_%=5%, Value2=0.063W, Value_Code=51R0, ValueDisplayed=51, AEC Category=Q200, AEC Grade=0, AEC Qualified=Y, ComponentLink1Description="Datasheet link", ComponentLink1URL=http://www.vishay.com/docs/20035/dcrcwe3.pdf, CompType=Resistor, EIA_Code=E24, MountType=SMT, PackageReference=0402, PartNumber=CRCW040251R0JNED, Res_ohm=51, RoHS=E, SizeArea_mm2=0.5, SizeX_mm=1, SizeY_mm=0.5, SizeZ_mm=0.6, Supplier 1=Digi-Key, Supplier 2=Newark, Supplier 3=Mouser, Supplier Part Number 2=72M6804, Supplier Part Number 3=71-CRCW0402J-51-E3, Technology="Thick Film", Value1=5%, VDC_V=50V
R37 R38 R44 R45 R87: library part CMP-0026728-1, "RES, 220 k, 1%, 0.0625 W, 0402", Manufacturer="Yageo America", Power_W=62.5mW, Supplier Part Number 1=311-220KLRCT-ND, TempCo="100 ppm/C", Tolerance_%=1%, Value2=0.0625W, Value_Code=220k, AEC Category=Q200, AEC Grade=N/A, AEC Qualified=N, ComponentLink1Description="Datasheet link", ComponentLink1URL=http://www.yageo.com/documents/recent/PYu-RC0402_51_RoHS_L_6_r.pdf, CompType=Resistor, LatestRevisionDate=2017-03-09, MountType=SMT, PackageReference=0402, PartNumber=RC0402FR-07220KL, Published=2008-06-26, Publisher="Texas Instruments", Res_ohm=220k, RoHS=Y, SizeArea_mm2=0.5, SizeX_mm=1, SizeY_mm=0.5, SizeZ_mm=0.6, Supplier 1=Digi-Key, Supplier 2=Newark, Supplier 3=Mouser, Supplier Part Number 2=98K7527, Supplier Part Number 3=603-RC0402FR-07220KL, Technology="Thick Film", U/M=EA, Value1=1%, ValueDisplayed=220k, VDC_V=50V
R39 R84: library part CMP-0026695-1, "RES, 3.30 k, 1%, 0.1 W, AEC-Q200 Grade 0, 0402", Manufacturer=Panasonic, Power_W=100mW, Supplier Part Number 1=P3.30KLCT-ND, TempCo="100 ppm/C", Tolerance_%=1%, Value2=0.1W, Value_Code=3k30, ValueDisplayed=3.30k, AEC Category=Q200, AEC Grade=0, AEC Qualified=Y, ComponentLink1Description="Datasheet link", ComponentLink1URL=http://industrial.panasonic.com/cdbs/www-data/pdf/RDA0000/AOA0000C86.pdf, CompType=Resistor, LatestRevisionDate=2017-03-09, MountType=SMT, PackageReference=0402, PartNumber=ERJ-2RKF3301X, Published=2008-06-26, Publisher="Texas Instruments", Res_ohm=3.3k, RoHS=Y, SizeArea_mm2=0.5, SizeX_mm=1, SizeY_mm=0.5, SizeZ_mm=0.6, Supplier 1=Digi-Key, Supplier 2=Newark, Supplier 3=Mouser, Supplier Part Number 2=64R5278, Supplier Part Number 3=667-ERJ-2RKF3301X, Technology="Thick Film", U/M=EA, Value1=1%, VDC_V=50V
R40: library part CMP-0026231-1, "RES, 2.20 k, 1%, 0.063 W, 0402", Manufacturer=Vishay-Dale, Power_W=63mW, Supplier Part Number 1=541-2.20KLCT-ND, TempCo="100 ppm/C", Tolerance_%=1%, Value2=0.063W, Value_Code=2k20, ValueDisplayed=2.20k, AEC Category=Q200, AEC Qualified=?, ComponentLink1Description="Datasheet link", ComponentLink1URL=http://www.vishay.com/docs/20035/dcrcwe3.pdf, CompType=Resistor, LatestRevisionDate=2017-03-09, MountType=SMT, PackageReference=0402, PartNumber=CRCW04022K20FKED, Published=2008-06-26, Publisher="Texas Instruments", Res_ohm=2.2k, RoHS=Y, SizeArea_mm2=0.5, SizeX_mm=1, SizeY_mm=0.5, SizeZ_mm=0.6, Supplier 1=Digi-Key, Supplier 2=Newark, Supplier 3=Mouser, Supplier Part Number 2=26W9020, Supplier Part Number 3=71-CRCW0402-2.2K-E3, Technology="Thick Film", U/M=EA, Value1=1%
R41: library part CMP-0026517-1, "RES, 6.81 k, 1%, 0.063 W, 0402", Manufacturer=Vishay-Dale, Power_W=63mW, Supplier Part Number 1=541-6.81KLCT-ND, TempCo="100 ppm/C", Tolerance_%=1%, Value2=0.063W, Value_Code=6k81, ValueDisplayed=6.81k, AEC Category=Q200, AEC Qualified=?, ComponentLink1Description="Datasheet link", ComponentLink1URL=http://www.vishay.com/docs/20035/dcrcwe3.pdf, CompType=Resistor, EIA_Code=E96, LatestRevisionDate=2017-03-09, MountType=SMT, PackageReference=0402, PartNumber=CRCW04026K81FKED, Published=2008-06-26, Publisher="Texas Instruments", Res_ohm=6.81k, RoHS=Y, SizeArea_mm2=0.5, SizeX_mm=1, SizeY_mm=0.5, SizeZ_mm=0.6, Supplier 1=Digi-Key, Supplier 2=Newark, Supplier 3=Mouser, Supplier Part Number 2=52K7188, Supplier Part Number 3=71-CRCW0402-6.81K-E3, Technology="Thick Film", U/M=EA, Value1=1%, VDC_V=50V
R42 R43: library part CMP-0026938-1, "RES, 4.7 k, 5%, 0.063 W, 0402", Manufacturer=Vishay-Dale, Power_W=63mW, Supplier Part Number 1=541-4.7KJCT-ND, TempCo="200 ppm/C", Tolerance_%=5%, Value2=0.063W, Value_Code=4k70, ValueDisplayed=4.7k, AEC Category=Q200, AEC Qualified=?, ComponentLink1Description="Datasheet link", ComponentLink1URL=http://www.vishay.com/docs/20035/dcrcwe3.pdf, CompType=Resistor, EIA_Code=E24, LatestRevisionDate=2017-03-09, MountType=SMT, PackageReference=0402, PartNumber=CRCW04024K70JNED, Published=2008-06-26, Publisher="Texas Instruments", Res_ohm=4.7k, RoHS=Y, SizeArea_mm2=0.5, SizeX_mm=1, SizeY_mm=0.5, SizeZ_mm=0.6, Supplier 1=Digi-Key, Supplier 2=Newark, Supplier 3=Mouser, Supplier Part Number 2=59M6733, Supplier Part Number 3=71-CRCW0402J-4.7K-E3, Technology="Thick Film", U/M=EA, Value1=5%, VDC_V=50V
R48: library part CMP-0026743-1, "RES, 820, 1%, 0.063 W, 0402", Manufacturer="Yageo America", Power_W=63mW, Supplier Part Number 1=311-820LRCT-ND, TempCo="100 ppm/C", Tolerance_%=1%, Value2=0.063W, Value_Code=820R, ValueDisplayed=820, AEC Category=Q200, AEC Grade=N/A, AEC Qualified=N, ComponentLink1Description="Datasheet link", ComponentLink1URL=http://www.yageo.com/documents/recent/PYu-RC_Group_51_RoHS_L_04.pdf, CompType=Resistor, LatestRevisionDate=2017-03-09, MountType=SMT, PackageReference=0402, PartNumber=RC0402FR-07820RL, Published=2008-06-26, Publisher="Texas Instruments", Res_ohm=820, RoHS=Y, SizeArea_mm2=0.5, SizeX_mm=1, SizeY_mm=0.5, SizeZ_mm=0.6, Supplier 1=Digi-Key, Supplier 2=Newark, Supplier 3=Mouser, Supplier Part Number 2=26M6794, Supplier Part Number 3=603-RC0402FR-07820RL, Technology="Thick Film", U/M=EA, Value1=1%, VDC_V=50V
R49: library part CMP-0026934-1, "RES, 470, 5%, 0.063 W, 0402", Manufacturer=Vishay-Dale, Power_W=63mW, Supplier Part Number 1=541-470JCT-ND, TempCo="200 ppm/C", Tolerance_%=5%, Value2=0.063W, Value_Code=470R, ValueDisplayed=470, AEC Category=Q200, AEC Qualified=?, ComponentLink1Description="Datasheet link", ComponentLink1URL=http://www.vishay.com/docs/20035/dcrcwe3.pdf, CompType=Resistor, EIA_Code=E24, LatestRevisionDate=2017-03-09, MountType=SMT, PackageReference=0402, PartNumber=CRCW0402470RJNED, Published=2008-06-26, Publisher="Texas Instruments", Res_ohm=470, RoHS=Y, SizeArea_mm2=0.5, SizeX_mm=1, SizeY_mm=0.5, SizeZ_mm=0.6, Supplier 1=Digi-Key, Supplier 2=Newark, Supplier 3=Mouser, Supplier Part Number 2=59M6737, Supplier Part Number 3=71-CRCW0402J-470-E3, Technology="Thick Film", U/M=EA, Value1=5%, VDC_V=50V
R51 R54: library part CMP-0026938-1, "RES, 4.7 k, 5%, 0.063 W, 0402", Manufacturer=Vishay-Dale, Power_W=63mW, Supplier Part Number 1=541-4.7KJCT-ND, TempCo="200 ppm/C", Tolerance_%=5%, Value2=0.063W, Value_Code=4k70, ValueDisplayed=DNC, AEC Category=Q200, AEC Qualified=?, ComponentLink1Description="Datasheet link", ComponentLink1URL=http://www.vishay.com/docs/20035/dcrcwe3.pdf, CompType=Resistor, EIA_Code=E24, LatestRevisionDate=2017-03-09, MountType=SMT, PackageReference=0402, PartNumber=CRCW04024K70JNED, Published=2008-06-26, Publisher="Texas Instruments", Res_ohm=4.7k, RoHS=Y, SizeArea_mm2=0.5, SizeX_mm=1, SizeY_mm=0.5, SizeZ_mm=0.6, Supplier 1=Digi-Key, Supplier 2=Newark, Supplier 3=Mouser, Supplier Part Number 2=59M6733, Supplier Part Number 3=71-CRCW0402J-4.7K-E3, Technology="Thick Film", U/M=EA, Value1=5%, VDC_V=50V
R52 R55: library part CMP-0026877-2, "RES, 220 k, 5%, 0.063 W, AEC-Q200 Grade 0, 0402", Manufacturer=Vishay-Dale, Power_W=63mW, Supplier Part Number 1=541-220KJCT-ND, TempCo="200 ppm/C", Tolerance_%=5%, Value2=0.063W, Value_Code=220k, AEC Category=Q200, AEC Grade=0, AEC Qualified=Y, ComponentLink1Description="Datasheet link", ComponentLink1URL=http://www.vishay.com/docs/20035/dcrcwe3.pdf, CompType=Resistor, EIA_Code=E24, MountType=SMT, PackageReference=0402, PartNumber=CRCW0402220KJNED, Res_ohm=220k, RoHS=E, SizeArea_mm2=0.5, SizeX_mm=1, SizeY_mm=0.5, SizeZ_mm=0.6, Supplier 1=Digi-Key, Supplier 2=Newark, Supplier 3=Mouser, Supplier Part Number 2=59M6717, Supplier Part Number 3=71-CRCW0402J-220K-E3, Technology="Thick Film", Value1=5%, ValueDisplayed=220k, VDC_V=50V
R53 R85 R88 R92: library part CMP-0025885-5, "RES, 0, 5%, 0.1 W, 0603", Manufacturer=Yageo, Power_W=100mW, Supplier Part Number 1=311-0.0GRCT-ND, TempCo="200 ppm/C", Tolerance_%=5%, Value2=0.1W, Value_Code=0000, ValueDisplayed=0, AEC Category=Q200, AEC Grade=N/A, AEC Qualified=N, ComponentLink1Description="Datasheet link", ComponentLink1URL=http://www.yageo.com/pdf/Pu-RC0603_51_PbFree_L_2.pdf, CompType=Resistor, EIA_Code=E24, MountType=SMT, PackageReference=0603, PartNumber=RC0603JR-070RL, Res_ohm=0, RoHS=Y, SizeArea_mm2=1.28, SizeAreaWB_mm2=4.68, SizeX_mm=1.6, SizeY_mm=0.8, SizeZ_mm=1, Supplier 1=Digi-Key, Supplier 2=Mouser, Supplier 3=Farnell, Supplier Part Number 2=603-RC0603JR-070RL, Supplier Part Number 3=9233130, Technology="Thick Film", Value1=5%, VDC_V=75V
R86: library part CMP-0026731-1, "RES, 330 k, 1%, 0.0625 W, 0402", Manufacturer="Yageo America", Power_W=62.5mW, Supplier Part Number 1=311-330KLRCT-ND, TempCo="100 ppm/C", Tolerance_%=1%, Value2=0.0625W, Value_Code=330k, AEC Category=Q200, AEC Grade=N/A, AEC Qualified=N, ComponentLink1Description="Datasheet link", ComponentLink1URL=http://www.yageo.com/documents/recent/PYu-RC0402_51_RoHS_L_6_r.pdf, CompType=Resistor, LatestRevisionDate=2017-03-09, MountType=SMT, PackageReference=0402, PartNumber=RC0402FR-07330KL, Published=2008-06-26, Publisher="Texas Instruments", Res_ohm=330k, RoHS=Y, SizeArea_mm2=0.5, SizeX_mm=1, SizeY_mm=0.5, SizeZ_mm=0.6, Supplier 1=Digi-Key, Supplier 2=Newark, Supplier 3=Mouser, Supplier Part Number 2=98K7541, Supplier Part Number 3=603-RC0402FR-07330KL, Technology="Thick Film", U/M=EA, Value1=1%, ValueDisplayed=330k, VDC_V=50V
R89: library part CMP-0026100-1, "RES, 1.00 M, 1%, 0.063 W, 0402", Manufacturer=Vishay-Dale, Power_W=63mW, Supplier Part Number 1=541-1.00MLCT-ND, TempCo="100 ppm/C", Tolerance_%=1%, Value2=0.063W, Value_Code=1M00, ValueDisplayed=1.00M, AEC Category=Q200, AEC Qualified=?, ComponentLink1Description="Datasheet link", ComponentLink1URL=http://www.vishay.com/docs/20035/dcrcwe3.pdf, CompType=Resistor, EIA_Code=E96, LatestRevisionDate=2017-03-09, MountType=SMT, PackageReference=0402, PartNumber=CRCW04021M00FKED, Published=2008-06-26, Publisher="Texas Instruments", Res_ohm=1M, RoHS=Y, SizeArea_mm2=0.5, SizeX_mm=1, SizeY_mm=0.5, SizeZ_mm=0.6, Supplier 1=Digi-Key, Supplier 2=Newark, Supplier 3=Mouser, Supplier Part Number 2=52K6593, Supplier Part Number 3=71-CRCW0402-1.0M-E3, Technology="Thick Film", U/M=EA, Value1=1%, VDC_V=50V
R93 R94 R95: library part CMP-0025885-5, "RES, 0, 5%, 0.1 W, 0603", Manufacturer=Yageo, Power_W=100mW, Supplier Part Number 1=311-0.0GRCT-ND, TempCo="200 ppm/C", Tolerance_%=5%, Value2=0.1W, Value_Code=0000, ValueDisplayed=DNC, AEC Category=Q200, AEC Grade=N/A, AEC Qualified=N, ComponentLink1Description="Datasheet link", ComponentLink1URL=http://www.yageo.com/pdf/Pu-RC0603_51_PbFree_L_2.pdf, CompType=Resistor, EIA_Code=E24, MountType=SMT, PackageReference=0603, PartNumber=RC0603JR-070RL, Res_ohm=0, RoHS=Y, SizeArea_mm2=1.28, SizeAreaWB_mm2=4.68, SizeX_mm=1.6, SizeY_mm=0.8, SizeZ_mm=1, Supplier 1=Digi-Key, Supplier 2=Mouser, Supplier 3=Farnell, Supplier Part Number 2=603-RC0603JR-070RL, Supplier Part Number 3=9233130, Technology="Thick Film", Value1=5%, VDC_V=75V
RT1: library part CMP-0084565-1, "Thermistor, DEC0002A (X1SON-2)", Alternate Manufacturer="Texas Instruments", Alternate PartNumber=TMP6131DECR, AEC Category=Q200, AEC Qualified=N, ComponentLink1Description="Datasheet Link", ComponentLink1URL=http://www.ti.com/lit/ds/symlink/tmp6.pdf, ComponentLink2Description="Product Folder", ComponentLink2URL=http://www.ti.com/product/tmp6, ComponentLink3Description="Online Datasheet", ComponentLink3URL=http://www.ti.com/product/tmp6/datasheet, CompType=IC, Manufacturer="Texas Instruments", MountType=SMT, PackageDescription=X1SON-2, PackageReference=DEC0002A, PartNumber=TMP6131DECT, SizeArea_mm2=0.6, SizeAreaWB_mm2=3.2, SizeX_mm=1, SizeY_mm=0.6, SizeZ_mm=0.5
S1 S2 S3: library part CMP-0002328-1, "Switch, SPST, 0.05 A, 12 VDC, SMD", CurrentRating_mA=50A, Manufacturer=Diptronics, Circuit=SPST, ComponentLink1Description="Datasheet URL", ComponentLink1URL=http://www.dip.com.tw/en/en-product-information/en-switch004/item/download/1976_b080c057386714e3a6604cbe658b9df3, CompType=Switch, LatestRevisionDate=2017-03-09, MountType=SMT, Orientation="Side Actuated", PackageReference=7.8x3.5mm, PartNumber=1188E-1K2-V-TR, PositionCount=1, Publisher="Texas Instruments", RoHS=Y, SizeArea_mm2=27.3, SizeAreaWB_mm2=53.9, SizeX_mm=7.8, SizeY_mm=3.5, SizeZ_mm=3.5, VDC_V=12V
SH-J1 SH-J2 SH-J3 SH-J4 SH-J5 SH-J6 SH-J7 SH-J8 SH-J9 SH-J10 SH-J11 SH-J12 SH-J13 SH-J14 SH-J15 SH-J16 SH-J17 SH-J18 SH-J19 SH-J20 SH-J21 SH-J22 SH-J23 SH-J24: library part CMP-0003623-3, "Shunt, 100mil, Gold plated, Black", Alternate Manufacturer=3M, Alternate PartNumber=969102-0000-DA, Manufacturer=Samtec, Supplier Part Number 1=SAM8858-ND, ClassName=Shunt, ComponentLink1Description="Datasheet Link", ComponentLink1URL=http://www.samtec.com/ftppub/pdf/SNT.PDF, CompType=Shunt, MountType=N/A, PackageReference=Shunt, PartNumber=SNT-100-BK-G, RoHS=Y, Supplier 1=Digi-Key
T1: library part CMP-0000035-1, "MOSFET, P-CH, -20 V, -0.82 A, SOT-323", Alternate Manufacturer=None, Manufacturer="Diodes Inc.", Supplier Part Number 1=DMG1013UW-7DICT-ND, Value1=0.7, Value2="0.622 nC", AEC Category=Q101, AEC Qualified=?, ChType=P, ComponentLink1Description="Datasheet link", ComponentLink1URL=http://www.diodes.com/datasheets/ds31861.pdf, CompType=MOSFET, IdsMax_A=-820mA, LatestRevisionDate=2017-03-09, LatestRevisionNote="Added parts.", MountType=SMT, PackageReference=SOT-323, PartNumber=DMG1013UW-7, Published=2008-06-19, Publisher="Texas Instruments", QgTyp_nC=0.622, Rdson45_ohm=0.75, RoHS=Y, SizeArea_mm2=4.84, SizeAreaWB_mm2=10.24, SizeX_mm=2.2, SizeY_mm=2.2, SizeZ_mm=1.1, Supplier 1=Digi-Key, Supplier 2=Mouser, Supplier Part Number 2=621-DMG1013UW-7, U/M=EA, VdsMax_V=-20V, Vgs_V=-6V
T2: library part CMP-0000466-1, "Transistor, NPN, 45 V, 0.1 A, SOT-323", Manufacturer="NXP Semiconductor", Supplier Part Number 1=568-6076-1-ND, Value1="0.1 A", Value2=800, AEC Category=Q101, AEC Qualified=?, ComponentLink1Description="Datasheet link", ComponentLink1URL=http://www.nxp.com/documents/data_sheet/BC849W_850W.pdf, CompType=BJT, HfeMax=800, IcRated_A=100mA, LatestRevisionDate=2017-03-09, MountType=SMT, NPN=1, PackageReference=SOT-323, PartNumber=BC850CW,115, PNP=0, Published=2008-07-31, Publisher="Texas Instruments", RoHS=Y, SizeArea_mm2=4.84, SizeAreaWB_mm2=10.24, SizeX_mm=2.2, SizeY_mm=2.2, SizeZ_mm=1.1, Supplier 1=Digi-Key, Supplier 2=Newark, Supplier 3=Mouser, Supplier Part Number 2=75R0746, Supplier Part Number 3=771-BC850CW-T/R, TaMax_C=150°C, TaMin_C=-65°C, U/M=EA, Vceo_V=45V, Vcesat1_V=250mV
TP1 TP2 TP3 TP4 TP5 TP6 TP7 TP8 TP9 TP10: library part CMP-0055138-1, "Test Point, Miniature, Black, TH", Color=Black, Manufacturer=Keystone, PartNumber=5001, Supplier Part Number 1=36-5001-ND, CNHeader=FALSE, ComponentLink1Description="Datasheet URL", ComponentLink1URL=http://www.keyelco.com/userAssets/file/M60-2p60.pdf, CompType="Test Point", ContactFinish=Silver, CT=TRUE, Green_EU RoHS=Passed, Green_EU RoHS-2=Incomplete, Green_Lifecycle=Active, Green_REACh=Passed, LatestRevisionDate=26/05/2017, MountType=TH, PackageReference="Black Miniature Testpoint", Publisher="Texas Instruments", RoHS=Y, Supplier 1=Digi-Key, Supplier 2=Mouser, Supplier Part Number 2=534-5001
USB1: library part CMP-0055311-1, "Receptacle, USB 2.0, Micro B, 5 Position, R/A, SMT", Color=Black, Current_A=1.8A, Manufacturer=Molex, Supplier Part Number 1=WM11263CT-ND, Voltage_V=30V, Cert_UL=Y, CNHeader=FALSE, ComponentLink1Description="Datasheet URL", ComponentLink1URL=http://www.molex.com/pdm_docs/sd/1051640001_sd.pdf, CompType=USB, ContactFinish=Gold, CT=TRUE, Gender=Female, LatestRevisionDate=26/05/2017, MountType=SMT, Orientation=R/A, PackageReference="Receptacle, USB 2.0, Micro B, 5 Pos, 0.65mm Pitch, R/A, SMT", PartNumber=1051640001, PinCount=5, Pitch_mm=0.65, Publisher="Texas Instruments", RoHS=Y, Supplier 1=Digi-Key, Supplier 2=Newark, Supplier 3=Mouser, Supplier Part Number 2=99Y3224, Supplier Part Number 3=538-105164-0001
XDS1: library part CMP-0077954-1, "MSP432E401YTPDT, PDT0128A (TQFP-128)", Alternate Manufacturer="Texas Instruments", Alternate PartNumber=MSP432E401YTPDT, AEC Category=Q200, AEC Qualified=N, ComponentLink1Description="Datasheet Link", ComponentLink1URL=http://www.ti.com/lit/ds/symlink/tm4c129encpdt.pdf, ComponentLink2Description="Product Folder", ComponentLink2URL=TBD, CompType=IC, Manufacturer="Texas Instruments", MountType=SMT, PackageDescription=TQFP-128, PackageReference=PDT0128A, PartId=1, PartNumber=MSP432E401YTPDTR, SizeArea_mm2=256, SizeAreaWB_mm2=324, SizeX_mm=16, SizeY_mm=16, SizeZ_mm=1.2
XDS2: library part CMP-0039611-2, "MSP430G2x52, MSP430G2x12 Mixed Signal Microcontroller, RSA0016B (VQFN-16)", Alternate PartNumber=MSP430G2452IRSA16T, Frequency(MHz)=16, Manufacturer="Texas Instruments", Operating Temperature Range="-40 to 85 C", Rating=Catalog, Temp Sensor=Yes, ADC="10-bit SAR", ADC Channels=8, AEC Category=Q200, AEC Qualified=N, Brown Out Reset=Yes, Cap touch I/O=Yes, Code_JEDEC=MO-220, Comparators=Yes, ComponentLink1Description="Datasheet Link", ComponentLink1URL=http://www.ti.com/lit/ds/symlink/msp430g2452.pdf, ComponentLink2Description="Product Folder", ComponentLink2URL=http://www.ti.com/product/msp430g2452, ComponentLink3Description="Online Datasheet", ComponentLink3URL=http://www.ti.com/product/msp430g2452/datasheet, CompType=IC, DatasheetVersion=SLAS722E, Eco-Plan="Green (RoHS & no Sb/Br)", Flash(KB)=8, GPIO=16, MountType=SMT, PackageDescription=VQFN-16, PackageReference=RSA0016B, PartNumber=MSP430G2452IRSA16R, RoHS=Y, SizeArea_mm2=16, SizeAreaWB_mm2=25, SizeX_mm=4, SizeY_mm=4, SizeZ_mm=1, SRAM(B)=256, Timers - 16-bit=1, Watchdog=Yes
Y3: library part CMP-0004635-1, "Crystal, 16 MHz, 8pF, SMD", Frequency_Fixed=16MHz, Frequency Stability=+/-30ppm, Manufacturer=NDK, Supplier Part Number 1=644-1157-1-ND, ComponentLink1Description="Datasheet Link", ComponentLink1URL=http://www.ndk.com/images/products/catalog/c_NX3225GA-STD-CRG-1_e.pdf, CompType=Crystal, LatestRevisionDate=18/04/2017, MountType=SMT, PackageReference=3.2x0.75x2.5mm, PartNumber=NX3225GA-16.000M-STD-CRG-1, Publisher="Texas Instruments", RoHS=Y, Supplier 1=Digi-Key, TaMax_C=70°C, TaMin_C=-10°C, U/M=EA
ZZ2 ZZ3 ZZ4: library part AssemblyNote, Alternate Manufacturer=-, Alternate PartNumber=-, ClassName=AssemblyNote, CompType=AssemblyNote, LatestRevisionDate=2012-06-14, LatestRevisionNote="Initial Version", Publisher="Texas Instruments", SymbolCreator=codlsc, SymbolVersion=2010-05-18

## Free pads (board coordinates)
  round 0 hole 21 slot 87 at 90 deg unplated: 1(1038.03,434.24)
  round 0 hole 21 slot 150 at 0 deg unplated: 1(1105.97,401.2) 1(1107.13,468)

## Via types
v1: diameter 28, hole 12, Top Layer to Bottom Layer, tented both sides, 89 vias
v2: diameter 28, hole 12, Top Layer to Bottom Layer, 77 vias
v3: diameter 19.68, hole 7.87, Top Layer to Bottom Layer, tented both sides, 12 vias
v4: diameter 36, hole 20, Top Layer to Bottom Layer, tented both sides, 7 vias
v5: diameter 19.68, hole 7.87, Top Layer to Bottom Layer, 5 vias
v6: diameter 40, hole 18, Top Layer to Bottom Layer, 1 vias
v7: diameter 28/28/28/28 (per signal layer), hole 12, Top Layer to Bottom Layer, tented top, 1 vias

## Nets (pads, with @x,y where several pads share a name; then routed paths per layer and width w, separated by ;. In a path a pad name is that pad's centre, name@x,y a point inside that pad or via, vN(x,y) a via of type N, cw(c..) or ccw(c..) an arc to the next point about the centre after c; other vN are vias at no path point)
3.3VM: J15.2 R2.2 | length 265
  Top Layer w10: R2.2@1180.12,274.91 R2.2@1182.66,272.37 1255.46,272.37 1270,286.91 J15.2@1270,455
3V3: C1.1 C4.1 C5.1 J1/J3.1 J7.1 J15.1 J101.6 J103.1 LED1.1 MSP1.4 R1.2 R9.2 R10.2 R93.1 S1.3 U1.8 | length 1790.8
  Top Layer w8: S1.3@135.56,2221.68 135.56,2275.13 v2(150.43,2290)
  Top Layer w10: J7.1@248.88,282 186.38,344.5 186.38,558.28 R93.1@260.1,632 ; R10.2@952,838.5 1002.5,838.5 v2(1020,821) ; MSP1.4@1207.33,1352.52 1260.52,1352.52 1275,1367 C4.1@1301.5,1367 ; C4.1@1318.5,1350 C5.1@1318.5,1295 1318.5,1273.5 v2(1348,1244) ; U1.8@1517.93,2187.9 1517.93,2175.33 1528.26,2165 v2(1617,2165) ; v2(1617,2084.88) J103.1@1700,2084.88 ; LED1.1@1861.53,195 1881.5,195 v2(1925,238.5) ; v2(2030,2060) 2049,2079 R1.2@2049,2120.38